# EAGLE board Teensy3p2CutoutFlip (EAGLE 9.6.2)
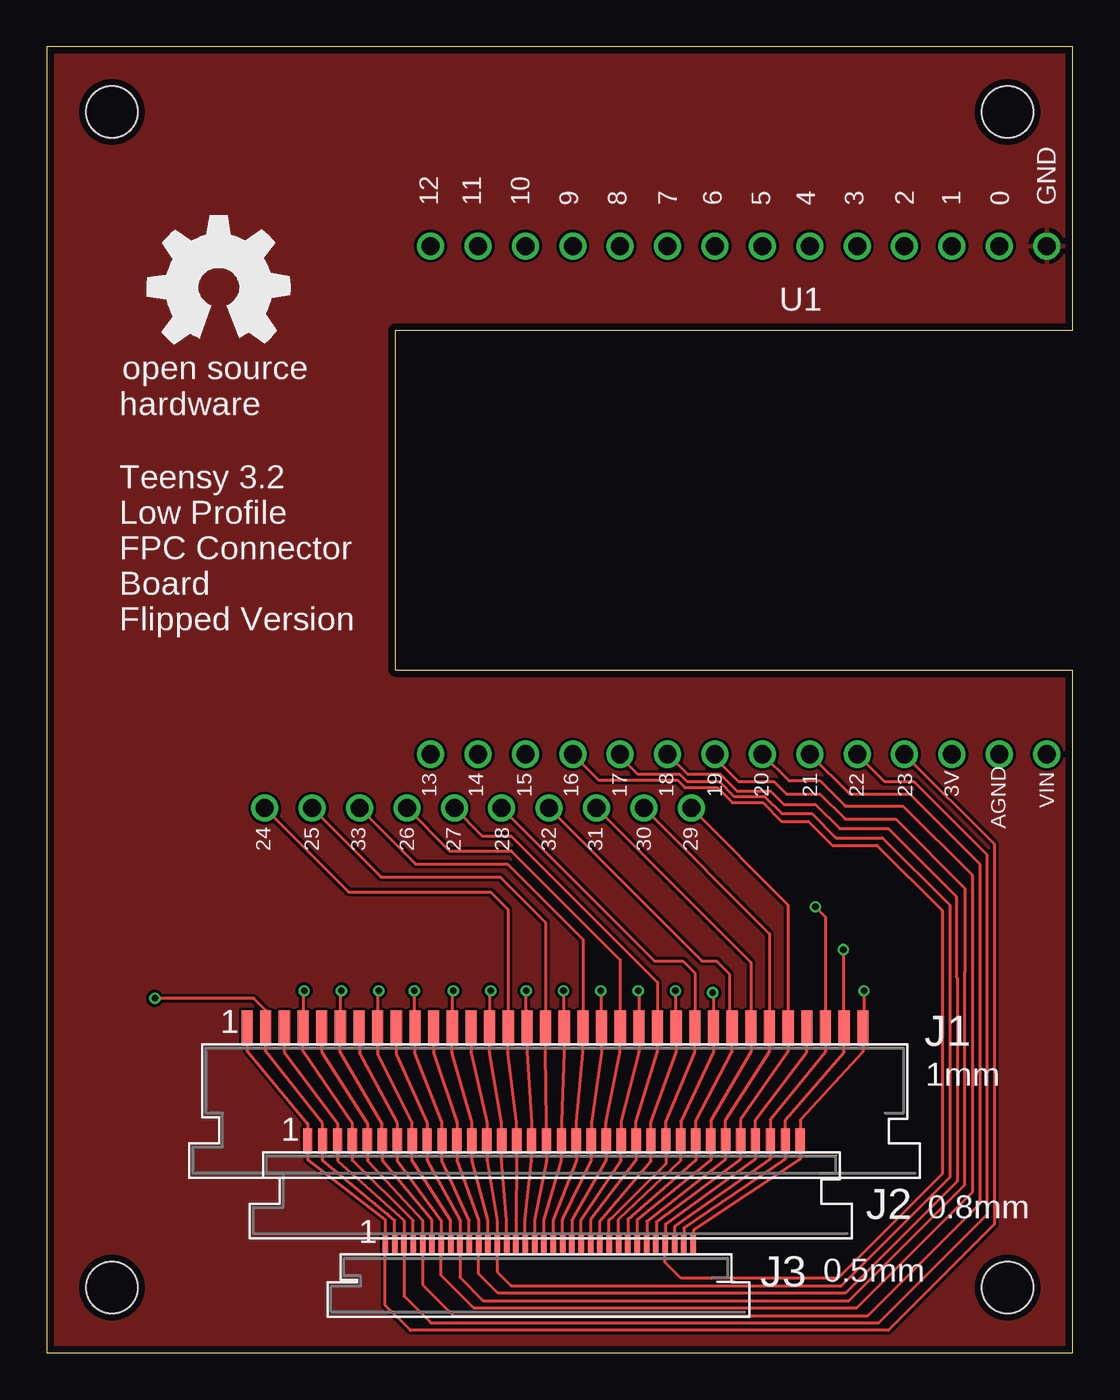
[diagram p0: board, top side]
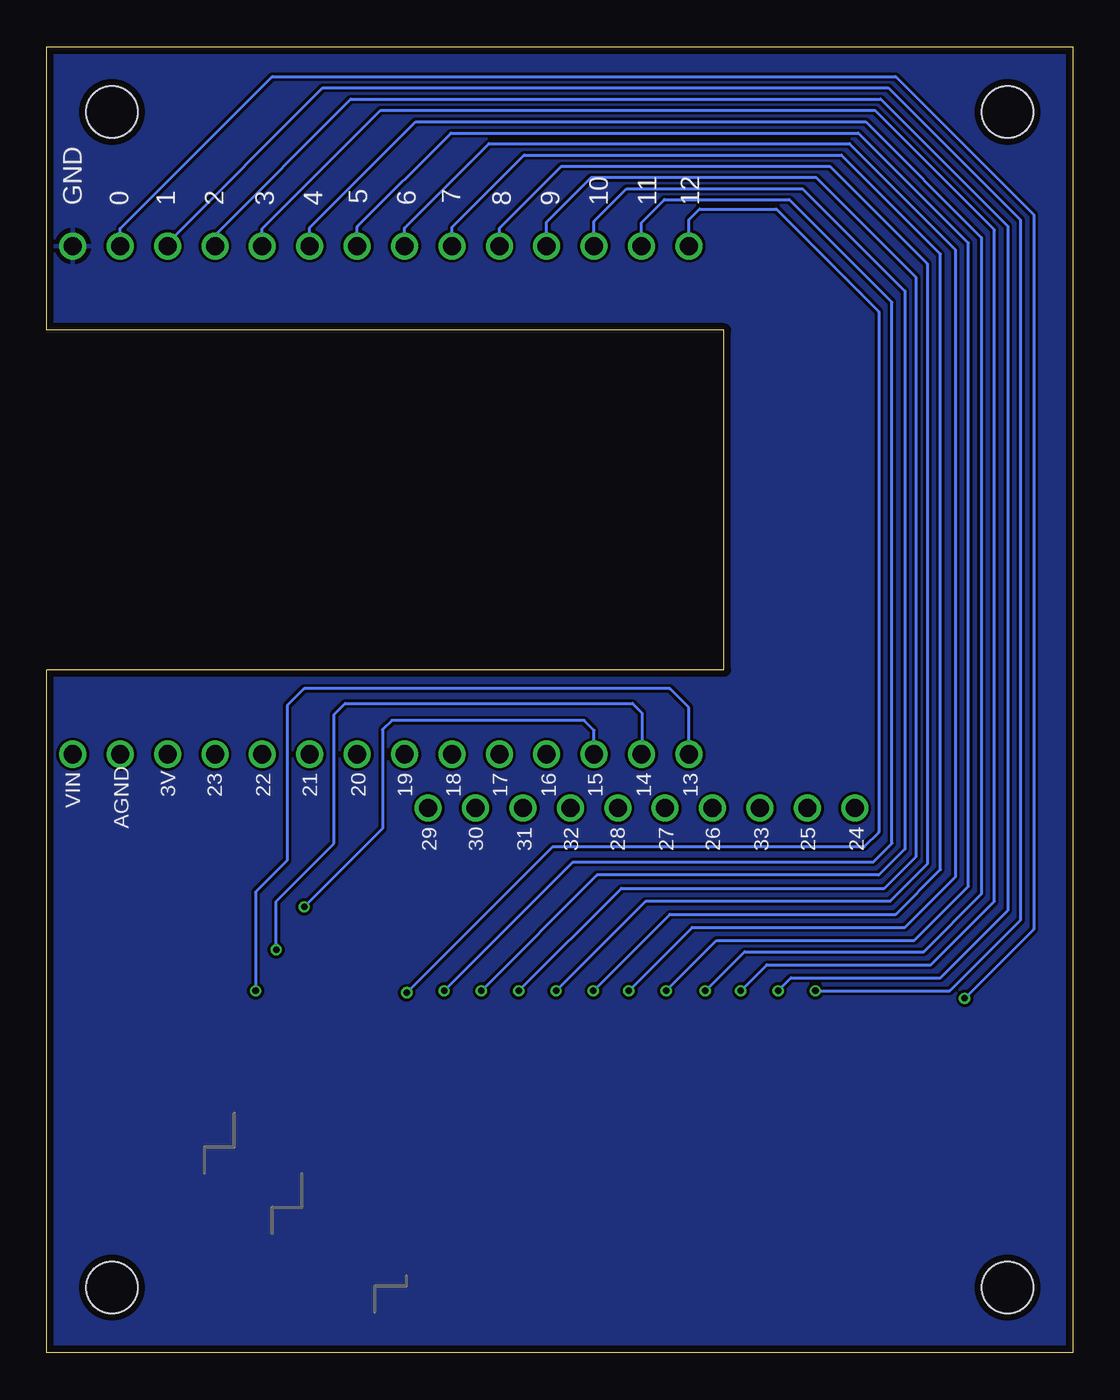
[diagram p1: board, bottom side, seen from below]

Size 55 x 70 mm. Coordinates in mm from the lower left corner, seen from the top.
Outline: 0,0 55,0 55,36.6 18.7,36.6 18.7,54.8 55,54.8 55,70 0,70 0,0
Copper layers (1*16): Top 0.035559375mm / dielectric 1.6mm / Bottom 0.035559375mm
Design rules "oshpark-2layer": minimum track width 6mil, minimum drill 10mil, track to track 6mil, track to pad 6mil, pad to pad 6mil, via to via 6mil, smd to smd 6mil, copper to edge 15mil, drill to drill 6mil, minimum pad ring 5mil, minimum via ring 5mil, stop-mask expansion 2.5mil, vias tented up to drill 0mil, thermal gap 10mil
Holes 2.75 mm at 3.5,66.5 3.5,3.5 51.5,3.5 51.5,66.5

## Footprints (pad centres in the part's own frame; a part is rotated, then mirrored left to right if it is on the bottom)
FPC34 = smd 0.6 x 1.9: 1 -13.7,3.86; 2 -12.7,3.86; 3 -11.7,3.86; 4 -10.7,3.86; 5 -9.7,3.86; 6 -8.7,3.86; 7 -7.7,3.86; 8 -6.7,3.86; 9 -5.7,3.86; 10 -4.7,3.86; 11 -3.7,3.86; 12 -2.7,3.86; 13 -1.7,3.86; 14 -0.7,3.86; 15 0.3,3.86; 16 1.3,3.86; 17 2.3,3.86; 18 3.3,3.86; 19 4.3,3.86; 20 5.3,3.86; 21 6.3,3.86; 22 7.3,3.86; 23 8.3,3.86; 24 9.3,3.86; 25 10.3,3.86; 26 11.3,3.86; 27 12.3,3.86; 28 13.3,3.86; 29 14.3,3.86; 30 15.3,3.86; 31 16.3,3.86; 32 17.3,3.86; 33 18.3,3.86; 34 19.3,3.86
FPC34_P8MM = smd 0.5 x 1.35: 1 -13.7,3.6; 2 -12.9,3.6; 3 -12.1,3.6; 4 -11.3,3.6; 5 -10.5,3.6; 6 -9.7,3.6; 7 -8.9,3.6; 8 -8.1,3.6; 9 -7.3,3.6; 10 -6.5,3.6; 11 -5.7,3.6; 12 -4.9,3.6; 13 -4.1,3.6; 14 -3.3,3.6; 15 -2.5,3.6; 16 -1.7,3.6; 17 -0.9,3.6; 18 -0.1,3.6; 19 0.7,3.6; 20 1.5,3.6; 21 2.3,3.6; 22 3.1,3.6; 23 3.9,3.6; 24 4.7,3.6; 25 5.5,3.6; 26 6.3,3.6; 27 7.1,3.6; 28 7.9,3.6; 29 8.7,3.6; 30 9.5,3.6; 31 10.3,3.6; 32 11.1,3.6; 33 11.9,3.6; 34 12.7,3.6
FPC34_P5MM = smd 0.3 x 1.1: 1 -13.7,3.5; 2 -13.2,3.5; 3 -12.7,3.5; 4 -12.2,3.5; 5 -11.7,3.5; 6 -11.2,3.5; 7 -10.7,3.5; 8 -10.2,3.5; 9 -9.7,3.5; 10 -9.2,3.5; 11 -8.7,3.5; 12 -8.2,3.5; 13 -7.7,3.5; 14 -7.2,3.5; 15 -6.7,3.5; 16 -6.2,3.5; 17 -5.7,3.5; 18 -5.2,3.5; 19 -4.7,3.5; 20 -4.2,3.5; 21 -3.7,3.5; 22 -3.2,3.5; 23 -2.7,3.5; 24 -2.2,3.5; 25 -1.7,3.5; 26 -1.2,3.5; 27 -0.7,3.5; 28 -0.2,3.5; 29 0.3,3.5; 30 0.8,3.5; 31 1.3,3.5; 32 1.8,3.5; 33 2.3,3.5; 34 2.8,3.5
TEENSY3P2CUTOUT = drill 0.965: 0 15.24,13.62; 1 12.7,13.62; 2 10.16,13.62; 3 7.62,13.62; 3V 12.7,-13.62; 4 5.08,13.62; 5 2.54,13.62; 6 0,13.62; 7 -2.54,13.62; 8 -5.08,13.62; 9 -7.62,13.62; 10 -10.16,13.62; 11 -12.7,13.62; 12 -15.24,13.62; 13 -15.24,-13.62; 14 -12.7,-13.62; 15 -10.16,-13.62; 16 -7.62,-13.62; 17 -5.08,-13.62; 18 -2.54,-13.62; 19 0,-13.62; 20 2.54,-13.62; 21 5.08,-13.62; 22 7.62,-13.62; 23 10.16,-13.62; 24 -24.13,-16.51; 25 -21.59,-16.51; 26 -16.51,-16.51; 27 -13.97,-16.51; 28 -11.43,-16.51; 29 -1.27,-16.51; 30 -3.81,-16.51; 31 -6.35,-16.51; 32 -8.89,-16.51; 33 -19.05,-16.51; AGND 15.24,-13.62; GND 17.78,13.62; VIN 17.78,-13.62

## Placement (x,y rotation side)
J1  1mm  [FPC34]  24.44,13.53 0 top
J2  0.8mm  [FPC34_P8MM]  27.69,7.75 0 top
J3  0.5mm  [FPC34_P5MM]  31.85,2.27 0 top
U1  Teensy 3.2  [TEENSY3P2CUTOUT]  35.82,45.7 0 top
U$1  [OSHW_8MM]  9.2,57.1 0 top

## Library data of the parts
J1 = FPC34
J2 = FPC34_p8mm
J3 = FPC34_p5mm
U1 = TEENSY3P2CUTOUTFLIP
U$1 = oshw

## Nets
0: J1.2 J2.2 J3.2 U1.0
1: J1.4 J2.4 J3.4 U1.1
2: J1.6 J2.6 J3.6 U1.2
3: J1.8 J2.8 J3.8 U1.3
4: J1.10 J2.10 J3.10 U1.4
5: J1.12 J2.12 J3.12 U1.5
6: J1.14 J2.14 J3.14 U1.6
7: J1.16 J2.16 J3.16 U1.7
8: J1.18 J2.18 J3.18 U1.8
9: J1.20 J2.20 J3.20 U1.9
10: J1.22 J2.22 J3.22 U1.10
11: J1.24 J2.24 J3.24 U1.11
12: J1.26 J2.26 J3.26 U1.12
13: J1.34 J2.34 J3.34 U1.13
14: J1.33 J2.33 J3.33 U1.14
15: J1.32 J2.32 J3.32 U1.15
16: J1.31 J2.31 J3.31 U1.16
17: J1.13 J2.13 J3.13 U1.17
18: J1.11 J2.11 J3.11 U1.18
19: J1.9 J2.9 J3.9 U1.19
20: J1.7 J2.7 J3.7 U1.20
21: J1.5 J2.5 J3.5 U1.21
22: J1.3 J2.3 J3.3 U1.22
23: J1.1 J2.1 J3.1 U1.23
24: J1.15 J2.15 J3.15 U1.24
25: J1.17 J2.17 J3.17 U1.25
26: J1.21 J2.21 J3.21 U1.26
27: J1.23 J2.23 J3.23 U1.27
28: J1.25 J2.25 J3.25 U1.28
29: J1.30 J2.30 J3.30 U1.29
30: J1.29 J2.29 J3.29 U1.30
31: J1.28 J2.28 J3.28 U1.31
32: J1.27 J2.27 J3.27 U1.32
33: J1.19 J2.19 J3.19 U1.33
GND: U1.GND

## Tracks (layer width: path | path; a pad name or v marks a point on that pad's centre or on a via)
0  (via drill 0.35)
  Top 0.152: J3.2 18.65,7.11 18.3,7.4 18.28,7.42 18.27,7.42 14.79,10.32 J2.2 14.79,12.29 11.74,16.15 J1.2 11.74,18.36 11.1,19 v5.8,19
  Bottom 0.152: U1.0 51.06,60.25 42.91,68.4 9.5,68.4 2.1,61 2.1,22.7 v5.8,19
1  (via drill 0.35)
  Top 0.152: J3.4 19.65,7.1 16.39,10.31 J2.4 16.39,12.28 13.74,16.16 J1.4 13.74,19.34 v13.8,19.4
  Bottom 0.152: U1.1 48.52,59.48 40.2,67.8 9.9,67.8 2.8,60.7 2.8,23.2 6.6,19.4 v13.8,19.4
2  (via drill 0.35)
  Top 0.152: J3.6 20.65,7.1 18,10.3 J2.6 17.99,12.28 15.74,16.12 J1.6 15.74,19.34 v15.8,19.4
  Bottom 0.152: U1.2 45.98,59.91 38.7,67.19 10.3,67.19 3.5,60.39 3.5,23.7 7.1,20.1 15.1,20.1 v15.8,19.4
3  (via drill 0.35)
  Top 0.152: J3.8 21.65,7.1 19.59,10.31 J2.8 19.59,12.34 17.75,15.99 J1.8 17.74,19.34 v17.8,19.4
  Bottom 0.152: U1.3 43.44,60.25 37.1,66.59 10.6,66.59 4.2,60.19 4.2,24.2 7.6,20.8 16.4,20.8 v17.8,19.4
4  (via drill 0.35)
  Top 0.152: J3.10 22.65,7.11 21.19,10.3 J2.10 21.19,12.34 19.74,16.04 J1.10 19.74,18.36 19.7,18.4 v19.7,19.4
  Bottom 0.152: U1.4 40.9,60.3 35.23,65.97 11.1,65.97 4.9,59.77 4.9,24.6 8,21.5 17.6,21.5 v19.7,19.4
5  (via drill 0.35)
  Top 0.152: J3.12 23.65,7.11 22.79,10.31 J2.12 22.79,12.34 21.74,16.08 J1.12 21.74,19.34 v21.8,19.4
  Bottom 0.152: U1.5 38.36,60.34 33.33,65.37 11.5,65.37 5.6,59.47 5.6,25 8.5,22.1 19.1,22.1 v21.8,19.4
6  (via drill 0.35)
  Top 0.152: J3.14 24.65,7.11 24.39,10.34 J2.14 24.39,12.33 23.74,16.1 J1.14 23.74,19.34 v23.8,19.4
  Bottom 0.152: U1.6 35.82,60.28 31.3,64.8 11.98,64.8 6.3,59.12 6.3,25.5 9,22.8 20.4,22.8 v23.8,19.4
7  (via drill 0.35)
  Top 0.152: J3.16 25.65,7.12 25.99,10.31 J2.16 25.99,12.36 25.74,16.1 J1.16 25.74,18.36 25.7,18.4 v25.7,19.4
  Bottom 0.152: U1.7 33.28,60.32 29.41,64.19 12.4,64.19 7.1,58.89 7.1,25.9 9.5,23.5 21.6,23.5 v25.7,19.4
8  (via drill 0.35)
  Top 0.152: J3.18 26.65,7.11 27.59,10.3 J2.18 27.59,12.36 27.74,16.13 J1.18 27.7,17.43 v27.7,19.4
  Bottom 0.152: U1.8 30.74,60.26 27.41,63.59 13.03,63.59 7.8,58.36 7.8,26.2 9.8,24.2 22.9,24.2 v27.7,19.4
9  (via drill 0.35)
  Top 0.152: J3.20 27.65,7.12 29.19,10.32 J2.20 29.19,12.35 29.74,16.1 J1.20 29.74,19.36 v29.7,19.4
  Bottom 0.152: U1.9 28.2,60.6 25.81,62.99 13.76,62.99 8.4,57.63 8.4,26.6 10.1,24.9 24.2,24.9 v29.7,19.4
10  (via drill 0.35)
  Top 0.152: J3.22 28.65,7.12 30.79,10.31 J2.22 30.79,12.37 31.74,16.13 J1.22 31.74,19.36 v31.7,19.4
  Bottom 0.152: U1.10 25.66,60.64 23.92,62.38 14.48,62.38 9,56.9 9,27 10.4,25.6 25.5,25.6 v31.7,19.4
11  (via drill 0.35)
  Top 0.152: J3.24 29.65,7.07 32.39,10.29 J2.24 32.37,11.35 32.37,12.35 33.74,16.13 J1.24 33.74,19.36 v33.7,19.4
  Bottom 0.152: U1.11 23.12,60.58 21.9,61.8 15.2,61.8 9.7,56.3 9.7,27.3 10.7,26.3 26.8,26.3 v33.7,19.4
12  (via drill 0.35)
  Top 0.152: J3.26 30.65,7.16 33.99,10.31 J2.26 33.99,12.41 35.74,16.13 J1.26 35.74,19.26 v35.7,19.3
  Bottom 0.152: U1.12 20.58,60.72 20,61.3 15.9,61.3 10.4,55.8 10.4,27.9 11.2,27.1 27.9,27.1 v35.7,19.3
13  (via drill 0.35)
  Top 0.152: J3.34 34.67,6.59 40.39,10.4 J2.34 40.39,12.48 43.74,16.14 J1.34 43.8,17.45 v43.8,19.4
  Bottom 0.152: U1.13 20.58,34.58 21.6,35.6 41.2,35.6 42.1,34.7 42.1,26.4 43.8,24.7 v43.8,19.4
14  (via drill 0.35)
  Top 0.152: J3.33 34.15,6.69 39.59,10.4 J2.33 39.59,12.48 42.74,16.11 J1.33 42.74,21.56 v42.7,21.6
  Bottom 0.152: v42.7,21.6 42.7,24.2 39.6,27.3 39.6,34.2 39,34.8 23.6,34.8 23.1,34.3 23.1,32.1 U1.14
15  (via drill 0.35)
  Top 0.152: J3.32 33.66,6.78 38.79,10.41 J2.32 38.79,12.49 41.74,16.11 J1.32 41.74,23.36 v41.2,23.9
  Bottom 0.152: U1.15 25.66,33.36 26.2,33.9 36.5,33.9 37,33.4 37,28.1 v41.2,23.9
16
  Top 0.152: J1.31 40.74,16.12 37.99,12.48 J2.31 37.99,10.4 33.16,6.89 J3.31 33.15,4.86 34,4 42.41,4 48,9.6 48,23.7 44.5,27.2 42.1,27.2 40.82,28.48 39.38,28.48 38.38,29.49 36.75,29.49 35.95,30.29 34.21,30.29 33.8,30.7 29.59,30.7 U1.16
17
  Top 0.152: J1.13 22.74,16.09 23.59,12.33 J2.13 23.59,10.33 24.15,7.11 J3.13 24.15,4.35 24.9,3.6 42.6,3.6 48.4,9.4 48.4,24 44.8,27.6 42.3,27.6 41,28.9 39.4,28.9 38.51,29.8 36.87,29.8 36.07,30.59 34.33,30.59 33.93,31 31.7,31 30.74,31.96 U1.17
18
  Top 0.152: J1.11 20.74,16.08 21.99,12.33 J2.11 21.99,10.29 23.15,7.11 J3.11 23.15,4.25 24.2,3.2 42.8,3.2 48.8,9.2 48.8,20.1 48.75,20.15 48.75,24.45 45.1,28.1 42.5,28.1 41.2,29.4 39.5,29.4 38.8,30.1 37,30.1 36.1,31 34.36,31 U1.18
19
  Top 0.152: J1.9 18.74,16.02 20.39,12.32 J2.9 20.39,10.31 22.15,7.1 J3.9 22.15,4.05 23.4,2.8 43,2.8 49.2,9 49.2,20.4 49.2,24.9 45.5,28.6 42.8,28.6 41.45,29.95 39.65,29.95 39,30.6 37.1,30.6 35.82,31.88 U1.19
20
  Top 0.152: J1.7 16.76,17.39 16.76,16.05 18.79,12.32 J2.7 18.79,10.31 21.15,7.1 J3.7 21.15,4.15 22.9,2.4 43.4,2.4 49.6,8.6 49.6,25.6 45.9,29.3 42.8,29.3 41.43,30.67 39.77,30.67 U1.20
21
  Top 0.152: J1.5 14.74,16.14 17.19,12.28 J2.5 17.2,10.3 20.15,7.1 J3.5 20.15,3.65 21.8,2 44,2 50,8 50,26.2 46.26,29.94 43.04,29.94 U1.21
22
  Top 0.152: J1.3 12.74,16.13 15.59,12.29 J2.3 15.6,10.3 19.15,7.1 J3.3 19.15,3.05 20.6,1.6 44.6,1.6 50.4,7.4 50.4,26.7 46.49,30.61 44.91,30.61 U1.22
23
  Top 0.152: J1.1 10.74,16.18 13.99,12.28 J2.1 13.99,10.34 18.15,7.12 J3.1 18.15,2.55 19.5,1.2 45.1,1.2 50.8,6.9 50.8,27.26 U1.23
24
  Top 0.152: J3.15 25.15,7.12 25.19,10.32 J2.15 25.19,12.34 24.74,16.05 J1.15 24.74,23.76 23.8,24.7 16.18,24.7 U1.24
25
  Top 0.152: J3.17 26.15,7.11 26.79,10.3 J2.17 26.79,12.36 26.74,16.08 J1.17 26.74,23.06 24.3,25.5 17.92,25.5 U1.25
26
  Top 0.152: J3.21 28.15,7.12 29.99,10.33 J2.21 29.99,12.35 30.74,16.11 J1.21 30.74,21.06 24.9,26.9 21.6,26.9 U1.26
27
  Top 0.152: J3.23 29.15,7.12 31.59,10.32 J2.23 31.58,12.37 32.74,16.13 J1.23 32.74,19.86 24.9,27.7 23.34,27.7 U1.27
28
  Top 0.152: J3.25 30.15,7.14 30.34,7.29 33.19,10.13 J2.25 33.19,12.38 34.74,16.11 J1.25 34.74,20.36 34.1,21 32.58,21 U1.28
29
  Top 0.152: J3.30 32.67,7.01 37.19,10.38 J2.30 37.19,12.48 39.74,16.14 J1.30 39.74,24 U1.29
30
  Top 0.152: J3.29 32.17,7.06 36.39,10.38 J2.29 36.39,12.47 38.74,16.13 J1.29 38.74,22.46 U1.30
31
  Top 0.152: J3.28 31.65,7.12 35.59,10.34 J2.28 35.59,12.45 37.74,16.13 J1.28 37.74,20.92 U1.31
32
  Top 0.152: J3.27 31.15,7.16 34.79,10.34 J2.27 34.79,12.43 36.73,16.13 36.74,16.13 36.74,17.3 | 36.74,17.3 J1.27 | U1.32 35.12,21 35.9,21 36.6,20.3 36.6,17.44 36.74,17.3
33
  Top 0.152: J3.19 27.15,7.11 28.39,10.31 J2.19 28.39,12.35 28.74,16.1 J1.19 28.74,22.16 24.7,26.2 19.76,26.2 U1.33
GND
  pour Top: 0,0 0,70 55,70 55,54.8 18.7,54.8 18.7,36.6 55,36.6 55,0
  pour Bottom: 0,0 0,70 55,70 55,54.8 18.7,54.8 18.7,36.6 55,36.6 55,0

## Text on the board
tPlace: 12 | 11 | 10 | 9 | 8 | 7 | 6 | 5 | 4 | 3 | 2 | 1 | 0 | GND | Teensy 3.2 / Low Profile / FPC Connector / Board / Flipped Version | 13 | 14 | 15 | 16 | 17 | 18 | 19 | 20 | 21 | 22 | 23 | 3V | VIN | AGND | 24 | 25 | 33 | 26 | 27 | 28 | 32 | 31 | 30 | 29 | 1mm | 0.8mm | 0.5mm
bPlace: 12 | 11 | 10 | 9 | 8 | 7 | 6 | 5 | 4 | 3 | 2 | 1 | 0 | GND | 13 | 14 | 15 | 16 | 17 | 18 | 19 | 20 | 21 | 22 | 23 | 3V | VIN | AGND | 24 | 25 | 33 | 26 | 27 | 28 | 32 | 31 | 30 | 29